# EAGLE board anemo2 (EAGLE 6.4)
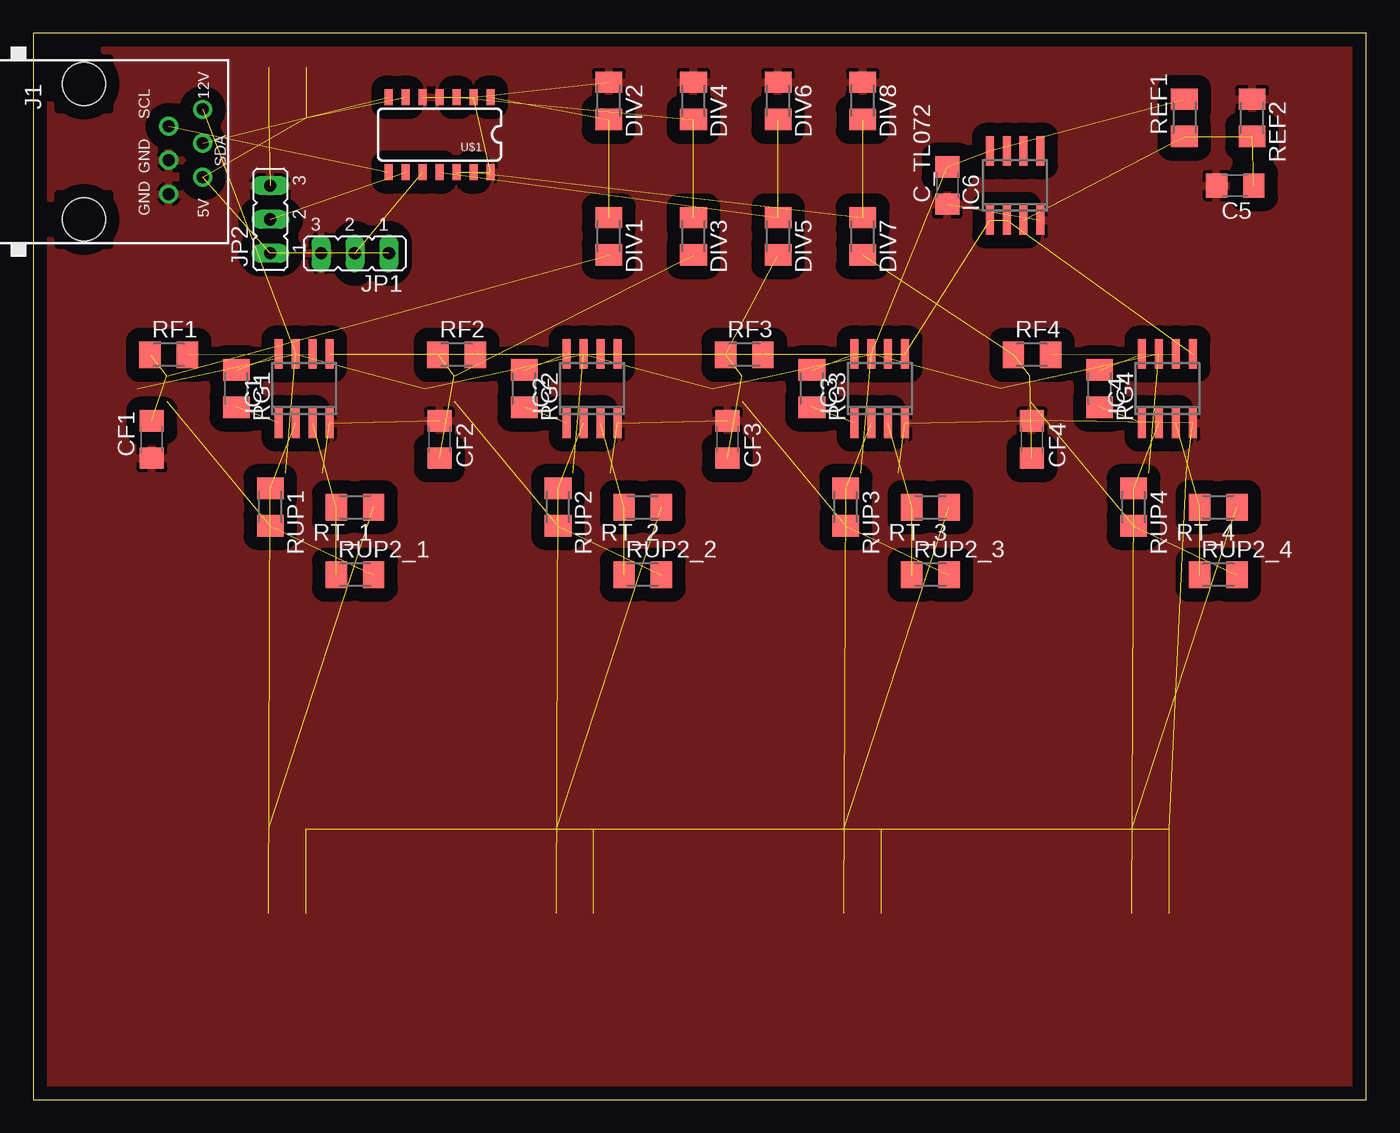
[diagram p0: board, top side]
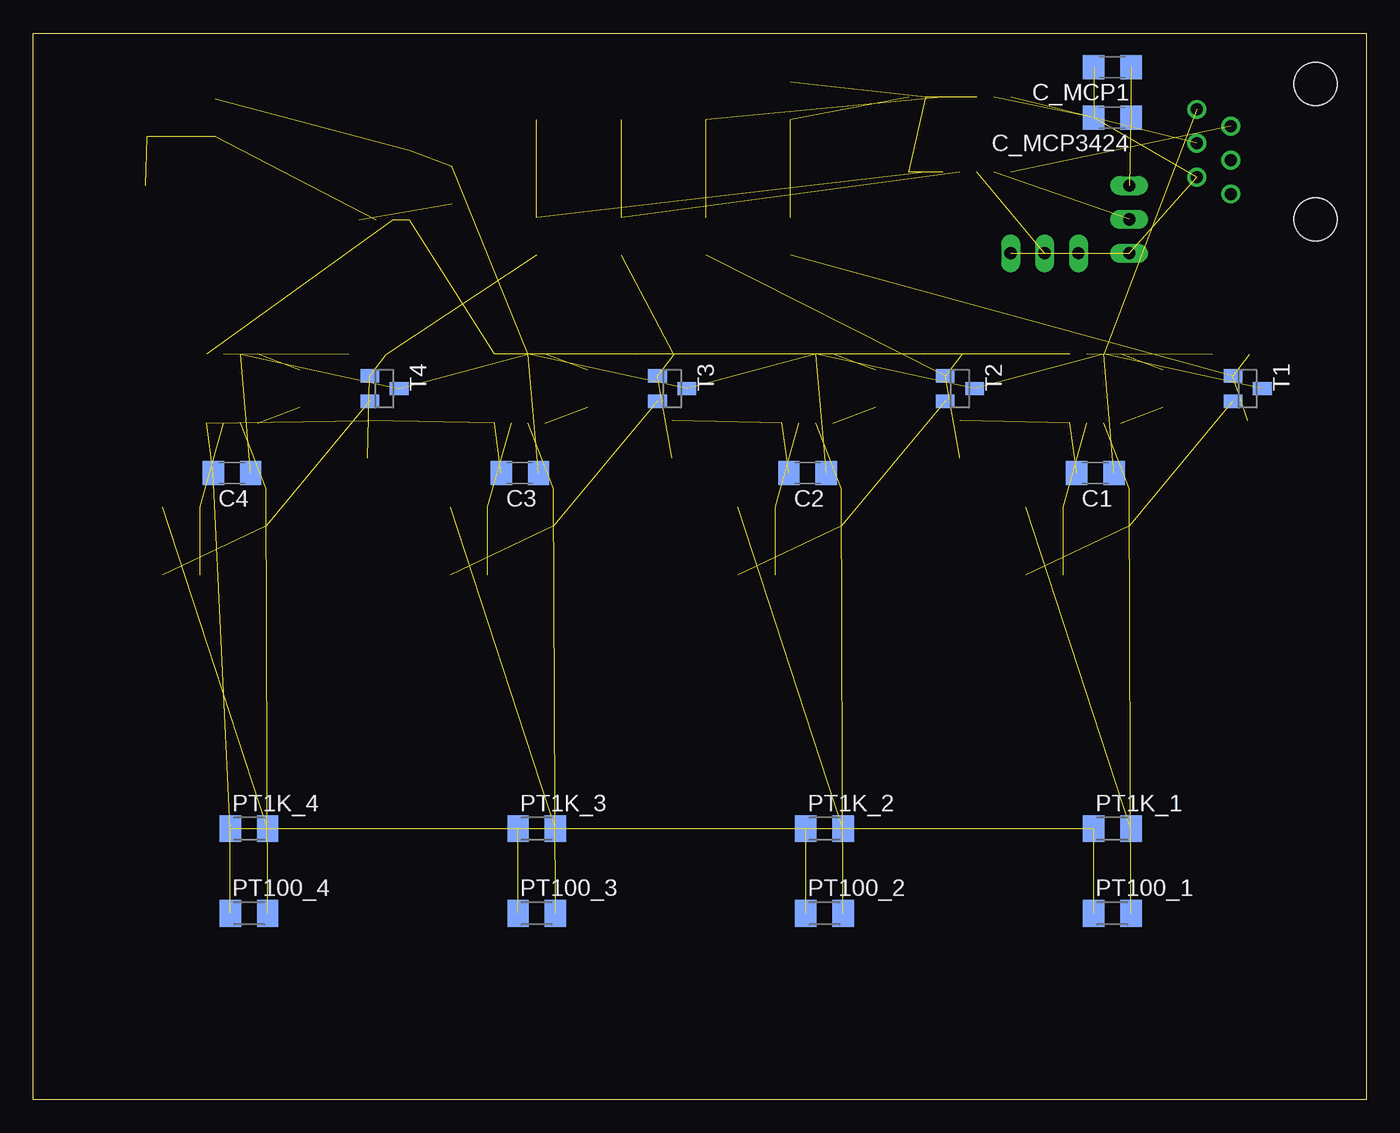
[diagram p1: board, bottom side, seen from below]

Size 100 x 80 mm. Coordinates in mm from the lower left corner, seen from the top.
Outline: 0,0 100,0 100,80 0,80 0,0
Copper layers (1*16): Top 0.035mm / dielectric 1.5mm / Bottom 0.035mm
Design rules "default": minimum track width 10mil, minimum drill 24mil, track to track 8mil, track to pad 8mil, pad to pad 8mil, via to via 8mil, smd to smd 8mil, copper to edge 40mil, drill to drill 8mil, minimum pad ring 10mil, minimum via ring 8mil, stop-mask expansion 4mil, vias tented up to drill 0mil, thermal gap 10mil
Net classes: 0 default: width 0.61 mm; 1 gnd: width 0.61 mm, clearance 1.016 mm

## Footprints (pad centres in the part's own frame; a part is rotated, then mirrored left to right if it is on the bottom)
C1206 = smd 1.6 x 1.8: 1 -1.4,0; 2 1.4,0
M1206 = smd 1.6 x 2: 1 -1.4,0; 2 1.4,0
SO8 = smd 0.6 x 2.2: 1 -1.905,-2.6; 2 -0.635,-2.6; 3 0.635,-2.6; 4 1.905,-2.6; 5 1.905,2.6; 6 0.635,2.6; 7 -0.635,2.6; 8 -1.905,2.6
SO08 = smd 0.6 x 2.2: 1 -1.905,-2.6; 2 -0.635,-2.6; 3 0.635,-2.6; 4 1.905,-2.6; 5 1.905,2.6; 6 0.635,2.6; 7 -0.635,2.6; 8 -1.905,2.6
RJ12-STRAIGHT-I2C = drill 0.9 pad 1.4: +5V 1.905,8.89; +12V -3.175,8.89; GND1 3.175,6.35; GND2 0.635,6.35; SCL -1.905,6.35; SDA -0.635,8.89 | hole 3.251: -5.08,0; 5.08,0
JP2 = drill 0.914 long: 1 -2.54,0; 2 0,0; 3 2.54,0
SOT23 = smd 1 x 1.4: 1 -0.95,-1.1; 2 0.95,-1.1; 3 0,1.1
14LDSOIC = smd 1.2 x 0.6: 1 -2.8,3.81; 2 -2.8,2.54; 3 -2.8,1.27; 4 -2.8,0; 5 -2.8,-1.27; 6 -2.8,-2.54; 7 -2.8,-3.81; 8 2.8,-3.81; 9 2.8,-2.54; 10 2.8,-1.27; 11 2.8,0; 12 2.8,1.27; 13 2.8,2.54; 14 2.8,3.81

## Placement (x,y rotation side)
C1  100n  [C1206]  20.32,46.99 180 bottom
C2  100n  [C1206]  41.91,46.99 180 bottom
C3  100n  [C1206]  63.5,46.99 180 bottom
C4  100n  [C1206]  85.09,46.99 180 bottom
C5  100n  [C1206]  90.17,68.58 180 top
C_MCP1  10µ  [C1206]  19.05,77.47 180 bottom
C_MCP3424  100n  [C1206]  19.05,73.66 180 bottom
C_TL072  100n  [C1206]  68.58,68.58 90 top
CF1  330n  [C1206]  8.89,49.53 90 top
CF2  330n  [C1206]  30.48,49.53 270 top
CF3  330n  [C1206]  52.07,49.53 270 top
CF4  330n  [C1206]  74.93,49.53 270 top
DIV1  20k  [M1206]  43.18,64.77 270 top
DIV2  10k  [M1206]  43.18,74.93 270 top
DIV3  20k  [M1206]  49.53,64.77 270 top
DIV4  10k  [M1206]  49.53,74.93 270 top
DIV5  20k  [M1206]  55.88,64.77 270 top
DIV6  10k  [M1206]  55.88,74.93 270 top
DIV7  20k  [M1206]  62.23,64.77 270 top
DIV8  10k  [M1206]  62.23,74.93 270 top
IC1  AD620R  [SO8]  20.32,53.34 0 top
IC2  AD620R  [SO8]  41.91,53.34 0 top
IC3  AD620R  [SO8]  63.5,53.34 0 top
IC4  AD620R  [SO8]  85.09,53.34 0 top
IC6  TL072D  [SO08]  73.66,68.58 0 top
J1  RJ12STRAIGHT-I2C  [RJ12-STRAIGHT-I2C]  3.81,71.12 270 top
JP1  [JP2]  24.13,63.5 180 top
JP2  [JP2]  17.78,66.04 90 top
PT1K_1  90.9  [M1206]  19.05,20.32 0 bottom
PT1K_2  90.9  [M1206]  40.64,20.32 0 bottom
PT1K_3  90.9  [M1206]  62.23,20.32 0 bottom
PT1K_4  90.9  [M1206]  83.82,20.32 0 bottom
PT100_1  90.9  [M1206]  19.05,13.97 0 bottom
PT100_2  90.9  [M1206]  40.64,13.97 0 bottom
PT100_3  90.9  [M1206]  62.23,13.97 0 bottom
PT100_4  90.9  [M1206]  83.82,13.97 0 bottom
REF1  100k  [M1206]  86.36,73.66 90 top
REF2  100k  [M1206]  91.44,73.66 270 top
RF1  100  [M1206]  10.16,55.88 0 top
RF2  100  [M1206]  31.75,55.88 0 top
RF3  100  [M1206]  53.34,55.88 0 top
RF4  100  [M1206]  74.93,55.88 0 top
RG1  500  [M1206]  15.24,53.34 270 top
RG2  500  [M1206]  36.83,53.34 270 top
RG3  500  [M1206]  58.42,53.34 270 top
RG4  500  [M1206]  80.01,53.34 270 top
RT_1  90.9  [M1206]  24.13,44.45 180 top
RT_2  90.9  [M1206]  45.72,44.45 180 top
RT_3  90.9  [M1206]  67.31,44.45 180 top
RT_4  90.9  [M1206]  88.9,44.45 180 top
RUP1  10  [M1206]  17.78,44.45 270 top
RUP2  10  [M1206]  39.37,44.45 270 top
RUP2_1  100  [M1206]  24.13,39.37 0 top
RUP2_2  100  [M1206]  45.72,39.37 0 top
RUP2_3  100  [M1206]  67.31,39.37 0 top
RUP2_4  100  [M1206]  88.9,39.37 0 top
RUP3  10  [M1206]  60.96,44.45 270 top
RUP4  10  [M1206]  82.55,44.45 270 top
T1  BC846  [SOT23]  8.89,53.34 270 bottom
T2  BC846  [SOT23]  30.48,53.34 270 bottom
T3  BC846  [SOT23]  52.07,53.34 270 bottom
T4  BC846  [SOT23]  73.66,53.34 270 bottom
U$1  MCP3424(SO14)  [14LDSOIC]  30.48,72.39 270 top

## Library data of the parts
C1-C5 C_MCP1 C_MCP3424 C_TL072 CF1-CF4 = rcl
DIV1-DIV8 PT1K_1-PT1K_4 PT100_1-PT100_4 REF1 REF2 RF1-RF4 RG1-RG4 RT_1-RT_4 RUP1 RUP2 RUP2_1-RUP2_4 RUP3 RUP4 = resistor
IC1-IC4 = analog-devices; MPN: AD620AR; OC_FARNELL: 1464424; OC_NEWARK: 05F7109
IC6 = linear
J1 = lpatiny
JP1 JP2 = jumper
T1-T4 = transistor
U$1 = mcp3424

## Nets
5V: C_MCP1.2 C_MCP3424.2 J1.+5V JP1.1 JP2.1 U$1.6
ADR0: JP2.2 U$1.9
ADR1: JP1.2 U$1.10
GND [gnd]: C1.2 C2.2 C3.2 C4.2 C5.2 C_MCP1.1 C_MCP3424.1 C_TL072.1 CF1.1 CF2.1 CF3.1 CF4.1 DIV2.1 DIV4.1 DIV6.1 DIV8.1 IC1.4 IC2.4 IC3.4 IC4.4 IC6.4 J1.GND1 J1.GND2 JP1.3 JP2.3 PT1K_1.1 PT1K_2.1 PT1K_3.1 PT1K_4.1 PT100_1.1 PT100_2.1 PT100_3.1 PT100_4.1 REF2.1 U$1.2 U$1.4 U$1.5 U$1.12 U$1.14
IN+1: IC1.3 RT_1.2 RUP2_1.1
IN+2: IC2.3 RT_2.2 RUP2_2.1
IN+3: IC3.3 RT_3.2 RUP2_3.1
IN+4: IC4.3 RT_4.2 RUP2_4.1
IN-1: IC1.2 PT100_1.2 RUP1.1
IN-2: IC2.2 PT100_2.2 RUP2.1
IN-3: IC3.2 PT100_3.2 RUP3.1
IN-4: IC4.2 PT100_4.2 RUP4.1
N$1: IC1.1 RG1.2
N$2: IC1.8 RG1.1
N$3: IC2.8 RG2.1
N$4: IC2.1 RG2.2
N$5: IC3.1 RG3.2
N$6: IC3.8 RG3.1
N$7: IC4.1 RG4.2
N$8: IC4.8 RG4.1
N$9: RUP1.2 RUP2_1.2 T1.2
N$10: C5.1 IC6.3 REF1.1 REF2.2
N$11: RUP2.2 RUP2_2.2 T2.2
N$12: RUP2_3.2 RUP3.2 T3.2
N$13: RUP2_4.2 RUP4.2 T4.2
N$18: IC1.6 RF1.2
N$19: IC2.6 RF2.2
N$20: IC3.6 RF3.2
N$21: IC4.6 RF4.2
N$23: PT1K_1.2 RT_1.1
N$25: PT1K_2.2 RT_2.1
N$27: PT1K_3.2 RT_3.1
N$29: PT1K_4.2 RT_4.1
OUT1: CF1.2 DIV1.2 RF1.1 T1.1
OUT2: CF2.2 DIV3.2 RF2.1 T2.1
OUT3: CF3.2 DIV5.2 RF3.1 T3.1
OUT4: CF4.2 DIV7.2 RF4.1 T4.1
REF: IC1.5 IC2.5 IC3.5 IC4.5 IC6.1 IC6.2
SCL: J1.SCL U$1.8
SDA: J1.SDA U$1.7
SIG1: DIV1.1 DIV2.2 U$1.1
SIG2: DIV3.1 DIV4.2 U$1.3
SIG3: DIV5.1 DIV6.2 U$1.11
SIG4: DIV7.1 DIV8.2 U$1.13
VCC: C1.1 C2.1 C3.1 C4.1 C_TL072.2 IC1.7 IC2.7 IC3.7 IC4.7 IC6.8 J1.+12V REF1.2 T1.3 T2.3 T3.3 T4.3

## Tracks (layer width: path | path; a pad name or v marks a point on that pad's centre or on a via)
5V  (5 unrouted)
ADR0  (1 unrouted)
ADR1  (1 unrouted)
GND  (24 unrouted)
  pour Top (isolate 0.305): 0,80.01 100.33,80.01 100.33,0 0,0
IN+1  (2 unrouted)
IN+2  (2 unrouted)
IN+3  (2 unrouted)
IN+4  (2 unrouted)
IN-1  (2 unrouted)
IN-2  (2 unrouted)
IN-3  (2 unrouted)
IN-4  (2 unrouted)
N$1  (1 unrouted)
N$2  (1 unrouted)
N$3  (1 unrouted)
N$4  (1 unrouted)
N$5  (1 unrouted)
N$6  (1 unrouted)
N$7  (1 unrouted)
N$8  (1 unrouted)
N$9  (2 unrouted)
N$10  (3 unrouted)
N$11  (2 unrouted)
N$12  (2 unrouted)
N$13  (2 unrouted)
N$18  (1 unrouted)
N$19  (1 unrouted)
N$20  (1 unrouted)
N$21  (1 unrouted)
N$23  (1 unrouted)
N$25  (1 unrouted)
N$27  (1 unrouted)
N$29  (1 unrouted)
OUT1  (3 unrouted)
OUT2  (3 unrouted)
OUT3  (3 unrouted)
OUT4  (3 unrouted)
REF  (5 unrouted)
SCL  (1 unrouted)
SDA  (1 unrouted)
SIG1  (2 unrouted)
SIG2  (2 unrouted)
SIG3  (2 unrouted)
SIG4  (2 unrouted)
VCC  (15 unrouted)